# Altium PCB PCB1.PcbDoc
Units mil, origin at the board's own origin, x right, y up, seen from the top; angles counter-clockwise.
Board outline 6000 x 4000 mil, 2 copper layers (Top Layer, Bottom Layer); 125 components, 82 nets, 417 pads, 0 vias.
Unrouted connection lines stored in the file: 236.
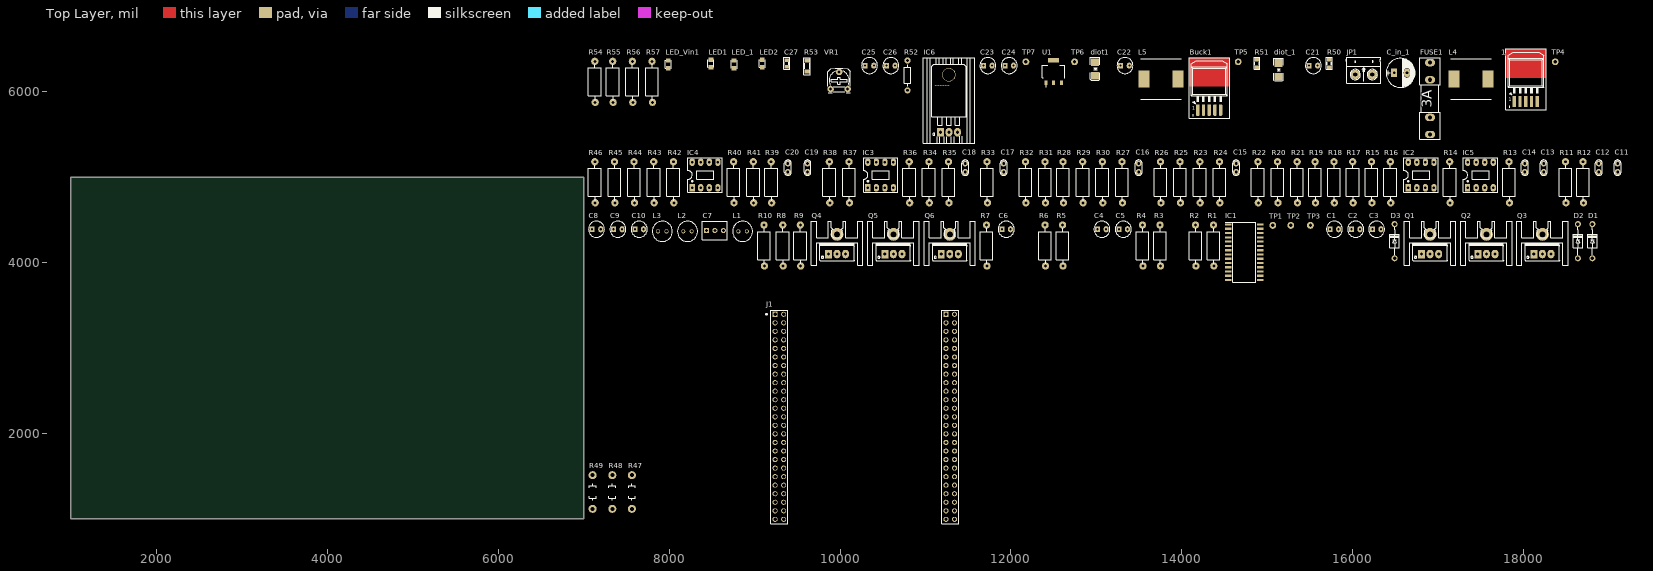
[diagram p0: Top Layer view]
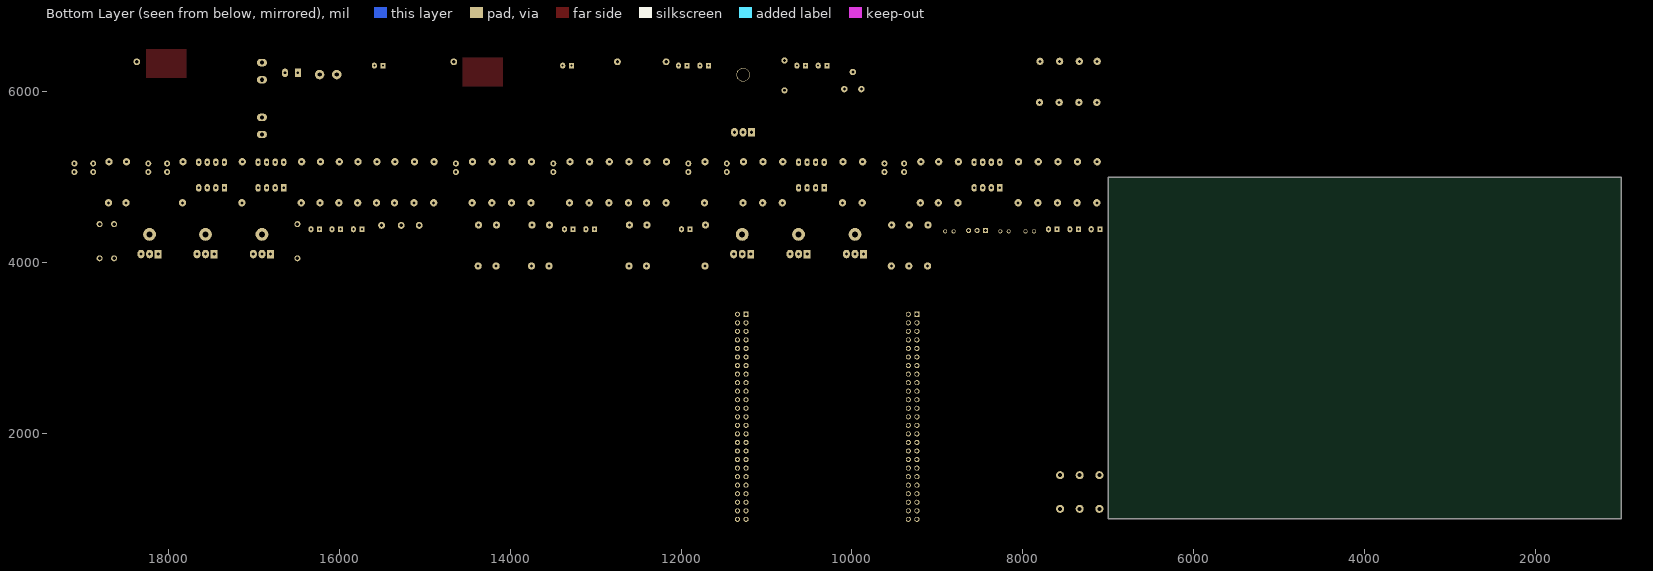
[diagram p1: Bottom Layer view, seen from below]

## Layer stack, top to bottom
Top Solder: solder mask 0.4, Solder Resist, Dk 3.5
Top Layer: signal copper 1.4
Dielectric 1: dielectric 12.6, FR-4, Dk 4.8
Bottom Layer: signal copper 1.4
Bottom Solder: solder mask 0.4, Solder Resist, Dk 3.5

## Board outline
1000,1000 7000,1000 7000,5000 1000,5000

## Design rules (kind name [scope] priority, off if disabled: settings)
Clearance [All] p1: gap=10 ignorepadtopadclearanceinfootprint=FALSE except(0: Arc-Hole Track-Hole SMDPad-Hole THPad-Hole Via-Hole Fill-Hole Poly-Hole Region-Hole Text-Hole)
PolygonConnect [All] p1: connectstyle=Relief reliefconductorwidth=10 reliefentries=4 polygonreliefangle="90 Angle" airgapwidth=10
RoomDefinition Source [InComponentClass('Source')] p1: confinementstyle=ConfineIn formatcopy=TRUE lockcomponents=FALSE outline 7045,5385 18510,5385 18510,6510 7045,6510
RoomDefinition Sheet2 [InComponentClass('Sheet2')] p2: confinementstyle=ConfineIn formatcopy=TRUE lockcomponents=FALSE outline 7045,3745 19215,3745 19215,5335 7045,5335
RoomDefinition Sheet1 [InComponentClass('Sheet1')] p3: confinementstyle=ConfineIn formatcopy=TRUE lockcomponents=FALSE outline 7045,3745 18870,3745 18870,5335 7045,5335
RoomDefinition KIT_STM32F4 [InComponentClass('KIT_STM32F4')] p4: confinementstyle=ConfineIn formatcopy=TRUE lockcomponents=FALSE outline 7045,1055 9340,1055 9340,3695 7045,3695
RoutingVias [All] p1: holewidth=28 width=50 viastyle="Through Hole" minholewidth=28 minwidth=50 maxholewidth=28 maxwidth=50
SolderMaskExpansion [All] p1: expansion=4
Width [All] p1: maxlimit=10 minlimit=10 preferedwidth=10
30 further rules are at their usual default settings.

## Classes and differential pairs
component class KIT_STM32F4: J1
component class Sheet1: C1 C2 C3 C4 C5 C6 C7 C8 C9 C10 D1 D2 D3 IC1 L1 L2 L3 Q1 Q2 Q3 Q4 Q5 Q6 R1 R2 R3 R4 R5 R6 R7 R8 R9 R10 R52 R56 R57 TP1 TP2 TP3
component class Sheet2: C11 C12 C13 C14 C15 C16 C17 C18 C19 C20 IC2 IC3 IC4 IC5 R11 R12 R13 R14 R15 R16 R17 R18 R19 R20 R21 R22 R23 R24 R25 R26 R27 R28 R29 R30 R31 R32 R33 R34 R35 R36 R37 R38 R39 R40 R41 R42 R43 R44 R45 R46
component class Source: Buck1 C21 C22 C23 C24 C25 C26 C27 C_in_1 diot1 diot_1 FUSE1 IC6 JP1 L4 L5 LED1 LED2 LED_1 LED_Vin1 R50 R51 R52 R53 R54 R55 R56 R57 TP4 TP5 TP6 TP7 U1 VR1

## Components (designator, comment, footprint, x,y, rotation, side; value= is the part's Value field where it differs from the comment)
1 "LM2576" TO263 18010,6120 r0 top
Buck1 "LM2576" TO263 14305,6020 r0 top
C1 "1uF" CA-ALU-2.54 15785,4390 r0 top value=104
C2 "1uF" CA-ALU-2.54 16035,4390 r0 top value=104
C3 "1uF" CA-ALU-2.54 16280,4390 r0 top value=104
C4 "1uF" CA-ALU-2.54 13065,4390 r0 top value=104
C5 "1uF" CA-ALU-2.54 13315,4390 r0 top value=104
C6 "1uF" CA-ALU-2.54 11945,4390 r0 top value=104
C7 "Header3" HDR3 8435,4375 r0 top
C8 "10uF" CA-ALU-2.54 7150,4390 r0 top value=104
C9 "10uF" CA-ALU-2.54 7400,4390 r0 top value=104
C10 "10uF" CA-ALU-2.54 7650,4390 r0 top value=104
C11 "1uF" CN1 19100,5060 r90 top value=100pF
C12 "1uF" CN1 18880,5060 r90 top value=100pF
C13 "1uF" CN1 18235,5060 r90 top value=100pF
C14 "1uF" CN1 18015,5060 r90 top value=100pF
C15 "1uF" CN1 14635,5060 r90 top value=100pF
C16 "1uF" CN1 13495,5060 r90 top value=100pF
C17 "1uF" CN1 11915,5060 r90 top value=100pF
C18 "1uF" CN1 11465,5060 r90 top value=100pF
C19 "1uF" CN1 9620,5060 r90 top value=100pF
C20 "1uF" CN1 9390,5060 r90 top value=100pF
C21 "1uF" CA-ALU-2.54 15540,6305 r0 top value=104
C22 "1uF" CA-ALU-2.54 13335,6305 r0 top value=104
C23 "1uF" CA-ALU-2.54 11730,6305 r0 top value=104
C24 "1uF" CA-ALU-2.54 11980,6305 r0 top value=104
C25 "1uF" CA-ALU-2.54 10345,6305 r0 top value=104
C26 "1uF" CA-ALU-2.54 10595,6305 r0 top value=104
C27 "104,0805" CN-SMD-0805 9375,6330 r90 top value=33pF
C_in_1 "100uF" CP1.5/3.4 16485,6220 r0 top value=1000uF/16V
D1 "Diode" DIO-1A 18805,4050 r90 top value=1N5007
D2 "Diode" DIO-1A 18635,4050 r90 top value=1N5007
D3 "Diode" DIO-1A 16490,4050 r90 top value=1N5007
diot1 "Diode SMD" DIO-SMD-106 12985,6265 r90 top value=1N5007
diot_1 "Diode SMD" DIO-SMD-106 15130,6255 r90 top value=1N5007
FUSE1 "F1A" Fuse1 16905,5920 r90 top value=Fuse
IC1 "IR2136SPBF" SOIC127P1032X265-28N 14730,4120 r0 top
IC2 "LM358" DIP8 16795,5025 r0 top
IC3 "LM358" DIP8 10470,5025 r0 top
IC4 "LM358" DIP8 8415,5025 r0 top
IC5 "LM358" DIP8 17490,5025 r0 top
IC6 "LM317" TO220NH 11175,5525 r0 top
J1 "STM32F4DISCOVERY" STMICROELECTRONICS_STM32F4DISCOVERY_STM32F4DISCOVERY(Primary) 9240,3395 r0 top
JP1 "Header 2_1" HED2 16030,6200 r0 top value="Header 2"
L1 "L-Filter" L-DIP-M-5.3 8860,4365 r0 top value="150 mH"
L2 "L-Filter" L-DIP-M-5.3 8215,4365 r0 top value="150 mH"
L3 "L-Filter" L-DIP-M-5.3 7920,4365 r0 top value="150 mH"
L4 "CDRH127NP" INDPM120120X800N 17385,6150 r0 top
L5 "CDRH127NP" INDPM120120X800N 13755,6150 r0 top
LED1 "power 0805" LED-0805-Blue 8490,6285 r90 top value="LED 3 - 5 ly 2 Colour"
LED2 "power 0805" LED-0805-Blue 9090,6285 r90 top value="LED 3 - 5 ly 2 Colour"
LED_1 "power 0805" LED-0805-Blue 8760,6275 r90 top value="LED 3 - 5 ly 2 Colour"
LED_Vin1 "power 0805" LED-0805-Blue 7990,6275 r90 top value="LED 3 - 5 ly 2 Colour"
Q1 "IRF840" TO220H1 16905,4100 r0 top
Q2 "IRF840" TO220H1 17565,4100 r0 top
Q3 "IRF840" TO220H1 18220,4100 r0 top
Q4 "IRF840" TO220H1 9965,4100 r0 top
Q5 "IRF840" TO220H1 10625,4100 r0 top
Q6 "IRF840" TO220H1 11285,4100 r0 top
R1 "1K" RES-1/2W 14370,4180 r90 top
R2 "1K" RES-1/2W 14160,4180 r90 top
R3 "1K" RES-1/2W 13745,4180 r90 top
R4 "1K" RES-1/2W 13540,4180 r90 top
R5 "1K" RES-1/2W 12605,4180 r90 top
R6 "1K" RES-1/2W 12400,4180 r90 top
R7 "1K" RES-1/2W 11715,4180 r90 top
R8 "1K" RES-1/2W 9330,4180 r90 top
R9 "1K" RES-1/2W 9535,4180 r90 top
R10 "1K" RES-1/2W 9110,4180 r90 top
R11 "100k" RES-1/2W 18490,4920 r90 top
R12 "100k" RES-1/2W 18695,4920 r90 top
R13 "220k" RES-1/2W 17830,4920 r90 top
R14 "10k" RES-1/2W 17135,4920 r90 top
R15 "10K" RES-1/2W 16220,4920 r90 top
R16 "100k" RES-1/2W 16440,4920 r90 top
R17 "3K" RES-1/2W 16000,4920 r90 top
R18 "220k" RES-1/2W 15780,4920 r90 top
R19 "1K" RES-1/2W 15560,4920 r90 top
R20 "100k" RES-1/2W 15120,4920 r90 top
R21 "100k" RES-1/2W 15350,4920 r90 top
R22 "100k" RES-1/2W 14890,4920 r90 top
R23 "100k" RES-1/2W 14210,4920 r90 top
R24 "100k" RES-1/2W 14440,4920 r90 top
R25 "10k" RES-1/2W 13980,4920 r90 top
R26 "10K" RES-1/2W 13750,4920 r90 top
R27 "220k" RES-1/2W 13300,4920 r90 top
R28 "100k" RES-1/2W 12610,4920 r90 top
R29 "100k" RES-1/2W 12840,4920 r90 top
R30 "100k" RES-1/2W 13070,4920 r90 top
R31 "3K" RES-1/2W 12400,4920 r90 top
R32 "220k" RES-1/2W 12170,4920 r90 top
R33 "1K" RES-1/2W 11720,4920 r90 top
R34 "100k" RES-1/2W 11040,4920 r90 top
R35 "100k" RES-1/2W 11270,4920 r90 top
R36 "100k" RES-1/2W 10810,4920 r90 top
R37 "10k" RES-1/2W 10105,4920 r90 top
R38 "10K" RES-1/2W 9875,4920 r90 top
R39 "220k" RES-1/2W 9195,4920 r90 top
R40 "100k" RES-1/2W 8755,4920 r90 top
R41 "100k" RES-1/2W 8985,4920 r90 top
R42 "100k" RES-1/2W 8050,4920 r90 top
R43 "3K" RES-1/2W 7820,4920 r90 top
R44 "220k" RES-1/2W 7590,4920 r90 top
R45 "1K" RES-1/2W 7360,4920 r90 top
R46 "100k" RES-1/2W 7130,4920 r90 top
R47 "1-1625873-0" *RESAD640W45L370D200 7565,1315 r90 top
R48 "1-1625873-0" *RESAD640W45L370D200 7335,1315 r90 top
R49 "1-1625873-0" *RESAD640W45L370D200 7105,1315 r90 top
R50 "Res" RES-SMD-0805 15725,6330 r90 top
R51 "Res" RES-SMD-0805 14880,6330 r90 top
R52 "1k" R1/4W 10790,6015 r90 top value="R1/4W - 1K"
R53 "0 ohm" RES-SMD-1206 9615,6300 r90 top
R54 "Res" RES-1/2W 7130,6095 r90 top
R55 "Res" RES-1/2W 7340,6095 r90 top
R56 "Res" RES-1/2W 7570,6095 r90 top
R57 "Res" RES-1/2W 7800,6095 r90 top
TP1 "" TP 15065,4435 r0 top
TP2 "" TP 15275,4435 r0 top
TP3 "" TP 15505,4435 r0 top
TP4 "" TP 18370,6350 r0 top
TP5 "" TP 14660,6350 r0 top
TP6 "" TP 12745,6350 r0 top
TP7 "" TP 12175,6350 r0 top
U1 "AMS1117-3.3" *SOT229P700X180-4N 12500,6235 r0 top
VR1 "10K" VR-S2 9890,6030 r0 top value="Volume 50k"

## Footprints (in the part's own frame and the unit in brackets; to place one, negate y for a bottom-side part, rotate by r counter-clockwise, add the part's x,y. Pads: shape width x height; smd on the part's side, far side on the other; paste and mask are expansions set on the pad)
*RESAD640W45L370D200 [mm]
  round 2.4 hole 1.2: 1(-5,0) 2(5,0)
  silkscreen extent -2.47,-1 2.47,1
*SOT229P700X180-4N [mm]
  rect 0.93x1.31 smd: 1(-2.29,-3.345) 2(0,-3.345) 3(2.29,-3.345)
  rect 3.24x1.31 smd: 4(0,3.345)
  silkscreen extent -3.36,-4.47 3.36,1.86
CA-ALU-2.54 [mm]
  rect 1.5x1.58 hole 0.6: 1(-1.27,0)
  oval 1.5x1.8 hole 0.6: 2(1.27,0)
  silkscreen extent -2.39,-2.39 2.39,2.39, body extent -2,-2.03 1.99,1.97, height 7.01
CN1 [mil]
  round 70 hole 31: 1(0,0) 2(100,0)
  silkscreen extent -40,-40 141,40, body extent -60,-30 170,37, height 265
CN-SMD-0805 [mil]
  rect 43.31x55 smd: 1(-39.36,0.01) 2(39.37,0.01)
  silkscreen extent -70,-34 70,33, body extent -39,-25 39,25, height 31
CP1.5/3.4 [mil] "Tu hoa 220->470uF,16V, 470uF/16V,25V"
  rect 70x100 hole 32: 1(0,0)
  oval 70x100 hole 32: 2(150,0)
  silkscreen extent -95,-170 245,170, body extent -85,-157 230,157, height 446
DIO-1A [mil]
  round 70 hole 40: 1(0,0) 2(400,0)
  silkscreen extent 35,-55 365,55, body extent -11,-50 411,54, height 102
DIO-SMD-106 [mil]
  rect 90x90.55 smd: 1(80,0) 2(-80,0)
  silkscreen extent -130,-55 135,55, body extent -99,-50 106,52, height 95
DIP8 [mil] "DIP, 8-Leads, Row Spacing 7.62mm, Pitch 2.54mm, Body 9.91x6.73mm"
  rect 60x90 hole 31: 1(-145,-150)
  oval 60x90 hole 31: 2(-45,-150) 3(55,-150) 4(155,-150) 5(155,150) 6(55,150) 7(-45,150) 8(-145,150)
  silkscreen extent -195,-200 205,200, body extent -213,-153 213,153, height 177
Fuse1 [mm]
  oval 2.2x3 hole 1.2: 1(-10.684,0) 1(-5.604,0) 2(5.579,0) 2(10.659,0)
  silkscreen extent -12.12,-3.05 12.09,3.05, body extent -10.84,-2.95 10.87,2.95, height 9.75
HDR3 [mm] "Connector; Header; 3 Position"
  rect 1.5x1.5 hole 0.9: 1(0,0)
  round 1.5 hole 0.9: 2(2.54,0) 3(5.08,0)
  silkscreen extent -1.14,-2.79 6.22,2.74, body extent -1.27,-2.92 6.35,2.88, height 11.72
HED2 [mil] "Header 2, 2 pin, hight 300mil, Pin to Pin 200, Colour Green"
  round 110 hole 50: 1(0,0) 2(200,0)
  silkscreen extent -106,-100 300,200, body extent -92,-140 302,155, height 394
INDPM120120X800N [mm]
  rect 3.2x5.1 smd: 1(-5.05,0) 2(5.05,0)
  silkscreen extent -6,-6 6,6, body extent -6,-6 6,6, height 8
L-DIP-M-5.3 [mm] "THT Inductor, 2-Leads, Body 5.3  mm"
  round 1.2 hole 0.8: 1(-1.25,0) 2(1.25,0)
  silkscreen extent -3,-3 3,3, body extent -2.44,-2.44 2.44,2.45, height 7.6
LED-0805-Blue [mil]
  rect 50x55 smd: 1(0,0) 2(90,0)
  silkscreen extent 0,-35 90,35, body extent 5,-25 85,25, height 43
R1/4W [mil] "R 1/4W, 2 Pin, 350mil"
  round 70 hole 31: 1(0,0) 2(350,0)
  silkscreen extent 48,-38 302,38, body extent -40,-47 386,47, height 111
RES-1/2W [mil]
  round 85 hole 35: 1(-220,-5) 2(260,0)
  silkscreen extent -195,-74 221,75, body extent -230,-60 270,56, height 121
RES-SMD-0805 [mil]
  rect 39.37x55 smd: 1(-45,0) 2(45,0)
  silkscreen extent -70,-34 70,33, body extent -39,-25 39,25, height 31
RES-SMD-1206 [mil]
  rect 50x65 smd: 1(-65,0) 2(65,0)
  silkscreen extent -99,-38 99,39, body extent -63,-31 63,32, height 40
SOIC127P1032X265-28N [mm]
  rect 1.925x0.65 smd: 1(-4.712,8.255) 2(-4.712,6.985) 3(-4.712,5.715) 4(-4.712,4.445) 5(-4.712,3.175) 6(-4.712,1.905) 7(-4.712,0.635) 8(-4.712,-0.635) 9(-4.712,-1.905) 10(-4.712,-3.175) 11(-4.712,-4.445) 12(-4.712,-5.715) 13(-4.712,-6.985) 14(-4.712,-8.255) 15(4.712,-8.255) 16(4.712,-6.985) 17(4.712,-5.715) 18(4.712,-4.445) 19(4.712,-3.175) 20(4.712,-1.905) 21(4.712,-0.635) 22(4.712,0.635) 23(4.712,1.905) 24(4.712,3.175) 25(4.712,4.445) 26(4.712,5.715) 27(4.712,6.985) 28(4.712,8.255)
  silkscreen extent -5.68,-8.95 3.4,8.95, body extent -5.16,-8.95 5.16,8.95, height 2.65
STMICROELECTRONICS_STM32F4DISCOVERY_STM32F4DISCOVERY(Primary) [mm]
  rect 1.508x1.508 hole 1: P1(0,0) P51(50.8,0)
  round 1.508 hole 1: P2(2.54,0) P3(0,-2.54) P4(2.54,-2.54) P5(0,-5.08) P6(2.54,-5.08) P7(0,-7.62) P8(2.54,-7.62) P9(0,-10.16) P10(2.54,-10.16) P11(0,-12.7) P12(2.54,-12.7) P13(0,-15.24) P14(2.54,-15.24) P15(0,-17.78) P16(2.54,-17.78) P17(0,-20.32) P18(2.54,-20.32) P19(0,-22.86) P20(2.54,-22.86) P21(0,-25.4) P22(2.54,-25.4) P23(0,-27.94) P24(2.54,-27.94) P25(0,-30.48) P26(2.54,-30.48) P27(0,-33.02) P28(2.54,-33.02) P29(0,-35.56) P30(2.54,-35.56) P31(0,-38.1) P32(2.54,-38.1) P33(0,-40.64) P34(2.54,-40.64) P35(0,-43.18) P36(2.54,-43.18) P37(0,-45.72) P38(2.54,-45.72) P39(0,-48.26) P40(2.54,-48.26) P41(0,-50.8) P42(2.54,-50.8) P43(0,-53.34) P44(2.54,-53.34) P45(0,-55.88) P46(2.54,-55.88) P47(0,-58.42) P48(2.54,-58.42) P49(0,-60.96) P50(2.54,-60.96) P52(53.34,0) P53(50.8,-2.54) P54(53.34,-2.54) P55(50.8,-5.08) P56(53.34,-5.08) P57(50.8,-7.62) P58(53.34,-7.62) P59(50.8,-10.16) P60(53.34,-10.16) P61(50.8,-12.7) P62(53.34,-12.7) P63(50.8,-15.24) P64(53.34,-15.24) P65(50.8,-17.78) P66(53.34,-17.78) P67(50.8,-20.32) P68(53.34,-20.32) P69(50.8,-22.86) P70(53.34,-22.86) P71(50.8,-25.4) P72(53.34,-25.4) P73(50.8,-27.94) P74(53.34,-27.94) P75(50.8,-30.48) P76(53.34,-30.48) P77(50.8,-33.02) P78(53.34,-33.02) P79(50.8,-35.56) P80(53.34,-35.56) P81(50.8,-38.1) P82(53.34,-38.1) P83(50.8,-40.64) P84(53.34,-40.64) P85(50.8,-43.18) P86(53.34,-43.18) P87(50.8,-45.72) P88(53.34,-45.72) P89(50.8,-48.26) P90(53.34,-48.26) P91(50.8,-50.8) P92(53.34,-50.8) P93(50.8,-53.34) P94(53.34,-53.34) P95(50.8,-55.88) P96(53.34,-55.88) P97(50.8,-58.42) P98(53.34,-58.42) P99(50.8,-60.96) P100(53.34,-60.96)
  silkscreen extent -2.74,-62.23 54.61,1.27
TO220H1 [mil] "TO-220 - 1-2-3"
  round 150 hole 70: 0(0,230)
  rect 80x100 hole 39: 1(-100,0)
  oval 80x100 hole 39: 2(0,0) 3(100,0)
  silkscreen extent -300,-130 300,385, body extent -246,-82 250,329, height 1000
TO220NH [mil] "TO-220 - 1-2-3"
  rect 80x100 hole 39: 1(0,0)
  oval 80x100 hole 39: 2(100,0) 3(200,0)
  round 160 hole 150: H(98,673)
  silkscreen extent -200,-127 400,873, body extent -100,-4 300,764, height 165
TO263 [mm]
  rrect50% 1x3.4 smd: 1(-3.019,-5.969) 2(-1.319,-5.969) 4(2.081,-5.969) 5(3.781,-5.969)
  rrect50% 1x3.4 smd mask+0: 3(0.381,-5.969)
  Top Layer region: -5.568,1.016 6.432,1.016 6.432,9.65 -5.568,9.65
  silkscreen extent -5.57,-8.35 6.43,9.65, body extent -4.73,-6.84 5.43,7.8, height 4.57
TP [mil] "Connect 1"
  round 80 hole 39: TP1(0,0)
  body extent -50,-50 50,50, height 179
VR-S2 [mil] "Resistor Variable"
  round 75 hole 35: 1(0,0) 2(100,200) 3(200,0)
  silkscreen extent -31,-44 231,246, body extent -87,-30 307,372, height 165

## Part data
1 Buck1: Max Input Voltage="12 V", Max Output Current="3 (6.0 peak) A", Max Output Voltage=mV, Temperature Range="-40 to +125 degC", Category=IC-Power, Min Input Voltage=mV, Min Output Voltage=mV, Mounting Technology="Surface Mount", Status=Unreleased, Supply Voltage=mV
C1 C2 C3 C4 C5 C6 C8 C9 C10 C21 C22 C23 C24 C25 C26: library part CN-ALU-DIP, "Capacitor (Semiconductor SIM Model)", LatestRevisionDate=17-Jul-2002, LatestRevisionNote="Re-released for DXP Platform.", PackageReference=C1206, Publisher="Altium Limited"
C7: "Header IDC, 3 x 1 Pin Vertical 2.54mm Pitch (Non-Boxed, Male)", Manufacturer="Würth Elektronik eiSos GmbH", partNo=613002143121, ComponentLink1 Description=Manufacturer, ComponentLink1URL=http://www.we-online.com, ComponentLink2 Description=Datasheet, ComponentLink2URL=http://katalog.we-online.de/em/datasheet/6130xx143121.pdf, Created by="Karrer Zheng", Created Date="29 March 2013", NoPins=02
C11 C12 C13 C14 C15 C16 C17 C18 C19 C20: library part CN1, "Cap np  1pF - 472pF"
C27: library part CN
C_in_1: library part CP4, "Cap 1000uF/16V - 220uF/50V", Description 1="2200uF-3300uF/6,3V - 1000uF-2200uF/10V", Description 2="1000uF/16V - 470uF => 1000uF/25V - 100uF/100V", Description 3=330uF>470uF/35V_220uF>470uF/50V_10uF>22uF/250V, Description 4="220uF => 330uF/63V - 10uF =>33uF/160 - 200V", Description 5="4,7uF>10uF/250V_3,3uF>10uF/400V - 2,2uF>4,7uF/450V"
D1 D2 D3 diot1 diot_1: "Default Diode", Code - JEDEC=DO-214-AB, Published=8-Jun-2000, Publisher="Altium Limited", Revision="July-2002: Re-released for DXP Platform."
FUSE1: library part Fuse, "Fuse", Designed by=VanDungEvn
IC1: "Integrated Circuit", Manufacturer_Name=Infineon, Mouser Part Number=942-IR2136SPBF, RS Part Number=5412284P, Allied_Number=70017147, Allied Price/Stock=https://www.alliedelec.com/infineon-ir2136spbf/70017147/, Datasheet Link=https://www.infineon.com/dgdl/ir2136.pdf?fileId=5546d462533600a4015355c8a02116a5, Height=2.65mm, Manufacturer_Part_Number=IR2136SPBF, Mouser Price/Stock=https://www.mouser.co.uk/ProductDetail/Infineon-IR/IR2136SPBF?qs=ellYJlE8XiFRzygBXfcgZw%3D%3D, RS Price/Stock=http://uk.rs-online.com/web/p/products/5412284P
IC2 IC3 IC4 IC5: "Low-Power Dual Operational Amplifier"
IC6: "Adj Voltage +1.2 -> +37V"
J1: "Development kit: ARM ST; pin strips, pin header; No.of", Package=None, Availability=Unavailable, MF=STMicroelectronics, MP=STM32F4DISCOVERY, Price=None, SnapEDA_Link=https://www.snapeda.com/parts/STM32F4DISCOVERY/STMicroelectronics/view-part/?ref=snap
JP1: "Header, 2-Pin", Manufacturer="Generic Components", Class=Connector
L1 L2 L3: library part L-DIP-1, "Inductor"
L4 L5: library part CDRH127NP-330MC, "Inductor", Manufacturer_Name=Sumida, Mouser Part Number=851-CDRH127NP-330MC, Datasheet Link=http://products.sumida.com/products/pdf/CDRH127.pdf, Height=8mm, Manufacturer_Part_Number=CDRH127NP-330MC, Mouser Price/Stock=https://www.mouser.co.uk/ProductDetail/Sumida/CDRH127NP-330MC?qs=YW7jAfUHneFV96nY7FREjQ%3D%3D
LED1 LED2 LED_1 LED_Vin1: library part "LED SMD"
Q1 Q2 Q3 Q4 Q5 Q6: "MOSFET N - CHANNEL 500V - 0.75 - 8A - TO-220"
R1 R2 R3 R4 R5 R6 R7 R8 R9 R10 R11 R12 R13 R14 R15 R16 R17 R18 R19 R20 R21 R22 R23 R24 R25 R26 R27 R28 R29 R30 R31 R32 R33 R34 R35 R36 R37 R38 R39 R40 R41 R42 R43 R44 R45 R46: library part Res, "Res", Manufacturer="Generic Components", Class=Passive, Published=08/06/2000, Publisher="Altium Hobart Technology Centre", SubClass=R
R47 R48 R49: library part RES_KIT_LR0204R, "RS LR0204 RESISTOR KIT", Package=None, Availability=Unavailable, MF="TE Connectivity AMP Connectors", MP="RES KIT LR0204R", Price=None, SnapEDA_Link=https://www.snapeda.com/parts/RES%20KIT%20LR0204R/TE%20Connectivity/view-part/3223324/?ref=snap, TE_purchase_URL=https://www.te.com/usa-en/product-1-1625873-0.html?te_bu=Cor&te_type=disp&te_campaign=seda_glo_cor-seda-global-disp-prtnr-fy19-seda-model-bom-cta_sma-317_1&elqCampaignId=32493
R50 R51 R53: library part Res-SMD, "Resistor", Manufacturer="Generic Components", Class=Passive, Published=08/06/2000, Publisher="Altium Hobart Technology Centre"
R52: library part R1/4W, "Resistor 1/4W"
R54 R55 R56 R57: Manufacturer="Generic Components", Class=Passive, Published=08/06/2000, Publisher="Altium Hobart Technology Centre", SubClass=R
TP1 TP2 TP3 TP4 TP5 TP6 TP7: library part TP, "CONNECT 1"
U1: "Sot223/Pkg 1-Amp 3.3-Volt Low Drop Out Voltage Regulatator", Package=None, Availability=Unavailable, MF="Advanced Monolithic Systems", MP=AMS1117-3.3, Price=None, SnapEDA_Link=https://www.snapeda.com/parts/AMS1117-3.3/Advanced%20Monolithic%20Systems/view-part/53450/?ref=snap
VR1: library part VR-S, "Var Resistor"

## Nets (pads, with @x,y where several pads share a name; then routed paths per layer and width w, separated by ;. In a path a pad name is that pad's centre, name@x,y a point inside that pad or via, vN(x,y) a via of type N, cw(c..) or ccw(c..) an arc to the next point about the centre after c; other vN are vias at no path point)
1.6V: C11.2 C13.2 C15.2 C16.2 C17.2 C19.2 C26.1 IC6.2 R11.2 R13.2 R23.2 R27.2 R34.2 R39.2 R52.2 TP7.TP1
3.3V: C12.1 C14.1 C18.1 C20.1 C24.1 C27.2 IC2.8 IC3.8 IC4.8 IC5.8 LED2.1 TP6.TP1 U1.2
5V: Buck1.4 C22.1 C23.1 C25.1 IC6.3 J1.P3 J1.P53 L5.2 LED_1.1 TP5.TP1 U1.3
15V: Buck1.1 C4.1 C5.1 C21.1 D1.1 D2.1 D3.1 IC1.1 L4.2 LED1.1 R3.1 R50.1 TP4.TP1
24V: Q1.2 Q2.2 Q3.2
GND: 1.3 1.5 Buck1.3 Buck1.5 C4.2 C5.2 C6.2 C8.2 C9.2 C10.2 C11.1 C12.2 C13.1 C14.2 C15.1 C16.1 C17.1 C18.2 C19.1 C20.2 C21.2 C22.2 C25.2 C26.2 C_in_1.2 diot1.1 diot_1.1 IC1.12 IC1.13 IC2.4 IC3.4 IC4.4 IC5.4 J1.P1 J1.P51 JP1.1 Q4.3 Q5.3 Q6.3 R9.1 R10.1 R18.2 R19.2 R32.2 R33.2 R44.2 R45.2 R51.2 R53.1 VR1.3
GND_1: C23.2 C24.2 C27.1 R53.2 R54.2 R55.2 R56.2 R57.2 U1.1
Net1_2: 1.2 diot_1.2 L4.1
Net1_4: 1.4 R50.2 R51.1
NetBuck1_2: Buck1.2 diot1.2 L5.1
NetC1_1: C1.1 D3.2 IC1.28
NetC1_2: C1.2 IC1.26
NetC2_1: C2.1 D2.2 IC1.24
NetC2_2: C2.2 IC1.22
NetC3_1: C3.1 D1.2 IC1.20
NetC3_2: C3.2 IC1.18
NetC6_1: C6.1 IC1.11 R3.2
NetC7_1: C7.1 C8.1 IC2.1 J1.P11 L1.2 R17.1 R22.1
NetC7_2: C7.2 C9.1 L2.2 R31.1
NetC7_3: C7.3 C10.1 IC4.1 J1.P15 L3.2 R43.1 R46.1
NetFUSE1_1: FUSE1.1 JP1.2
NetIC1_2: IC1.2 J1.P43
NetIC1_3: IC1.3 J1.P45
NetIC1_4: IC1.4 J1.P47
NetIC1_5: IC1.5 J1.P42
NetIC1_6: IC1.6 J1.P44
NetIC1_7: IC1.7 J1.P46
NetIC1_8: IC1.8
NetIC1_9: IC1.9 R8.1 R9.2
NetIC1_10: IC1.10 J1.P87
NetIC1_14: IC1.14 R7.2
NetIC1_15: IC1.15 R6.2
NetIC1_16: IC1.16 R5.2
NetIC1_19: IC1.19 R4.2
NetIC1_23: IC1.23 R2.2
NetIC1_27: IC1.27 R1.2
NetIC2_2: IC2.2 R18.1 R22.2
NetIC2_3: IC2.3 R13.1 R16.1
NetIC2_5: IC2.5 R27.1 R30.1
NetIC2_6: IC2.6 R32.1 R36.2
NetIC2_7: IC2.7 J1.P13 R36.1
NetIC3_1: IC3.1 J1.P16 R41.1
NetIC3_2: IC3.2 R38.1 R40.2
NetIC3_3: IC3.3 R35.1 R37.1
NetIC4_2: IC4.2 R44.1 R46.2
NetIC4_3: IC4.3 R39.1 R42.1
NetIC5_1: IC5.1 J1.P12 R21.1
NetIC5_2: IC5.2 R15.1 R20.2
NetIC5_3: IC5.3 R12.1 R14.1
NetIC5_5: IC5.5 R24.1 R25.1
NetIC5_6: IC5.6 R26.1 R28.2
NetIC5_7: IC5.7 J1.P14 R29.1
NetIC6_1: IC6.1 VR1.1
NetJ1_P89: J1.P89
NetLED1_2: LED1.2 R55.1
NetLED2_2: LED2.2 R57.1
NetLED_1_2: LED_1.2 R56.1
NetLED_Vin1_2: LED_Vin1.2 R54.1
NetQ1_1: Q1.1 R1.1
NetQ1_3: Q1.3 Q4.2 R14.2 R47.1 TP1.TP1
NetQ2_1: Q2.1 R2.1
NetQ2_3: Q2.3 Q5.2 R25.2 R48.1 TP2.TP1
NetQ3_1: Q3.1 R4.1
NetQ3_3: Q3.3 Q6.2 R37.2 R49.1 TP3.TP1
NetQ4_1: Q4.1 R5.1
NetQ5_1: Q5.1 R6.1
NetQ6_1: Q6.1 R7.1
NetR8_2: R8.2 R10.2
NetR11_1: R11.1 R12.2
NetR16_2: R16.2 R17.2 R19.1
NetR20_1: R20.1 R21.2
NetR23_1: R23.1 R24.2
NetR28_1: R28.1 R29.2
NetR30_2: R30.2 R31.2 R33.1
NetR34_1: R34.1 R35.2
NetR40_1: R40.1 R41.2
NetR42_2: R42.2 R43.2 R45.1
NetR52_1: R52.1 VR1.2
U: L1.1 R15.2 R47.2
V: L2.1 R26.2 R48.2
V_IN: 1.1 C_in_1.1 FUSE1.2 LED_Vin1.1
W: L3.1 R38.2 R49.2
pads on no net: IC1.17 IC1.21 IC1.25 IC3.5 IC3.6 IC3.7 IC4.5 IC4.6 IC4.7 IC6.H J1.P2 J1.P4 J1.P5 J1.P6 J1.P7 J1.P8 J1.P9 J1.P10 J1.P17 J1.P18 J1.P19 J1.P20 J1.P21 J1.P22 J1.P23 J1.P24 J1.P25 J1.P26 J1.P27 J1.P28 J1.P29 J1.P30 J1.P31 J1.P32 J1.P33 J1.P34 J1.P35 J1.P36 J1.P37 J1.P38 J1.P39 J1.P40 J1.P41 J1.P48 J1.P49 J1.P50 J1.P52 J1.P54 J1.P55 J1.P56 J1.P57 J1.P58 J1.P59 J1.P60 J1.P61 J1.P62 J1.P63 J1.P64 J1.P65 J1.P66 J1.P67 J1.P68 J1.P69 J1.P70 J1.P71 J1.P72 J1.P73 J1.P74 J1.P75 J1.P76 J1.P77 J1.P78 J1.P79 J1.P80 J1.P81 J1.P82 J1.P83 J1.P84 J1.P85 J1.P86 J1.P88 J1.P90 J1.P91 J1.P92 J1.P93 J1.P94 J1.P95 J1.P96 J1.P97 J1.P98 J1.P99 J1.P100 Q1.0 Q2.0 Q3.0 Q4.0 Q5.0 Q6.0 U1.4

## Text inside footprints (layer, text, board x,y; h text height)
Buck1: Top Overlay "1" at 14122.14,5787 h39.37
FUSE1: Top Overlay "3A" at 16966,5812 h196.85 r90
IC6: Top Overlay "------" at 11106,6052 h60